# Altium PCB PowerBoard.PcbDoc (part 3 of 3)
Units mil, origin at the board's own origin, x right, y up, seen from the top; angles counter-clockwise.
Board outline 7560.09 x 3815.99 mil, 4 copper layers (Top Layer, Internal Plane 2, Internal Plane 1, Bottom Layer); 319 components, 249 nets, 1089 pads, 461 vias.
Unrouted connection lines stored in the file: 1.
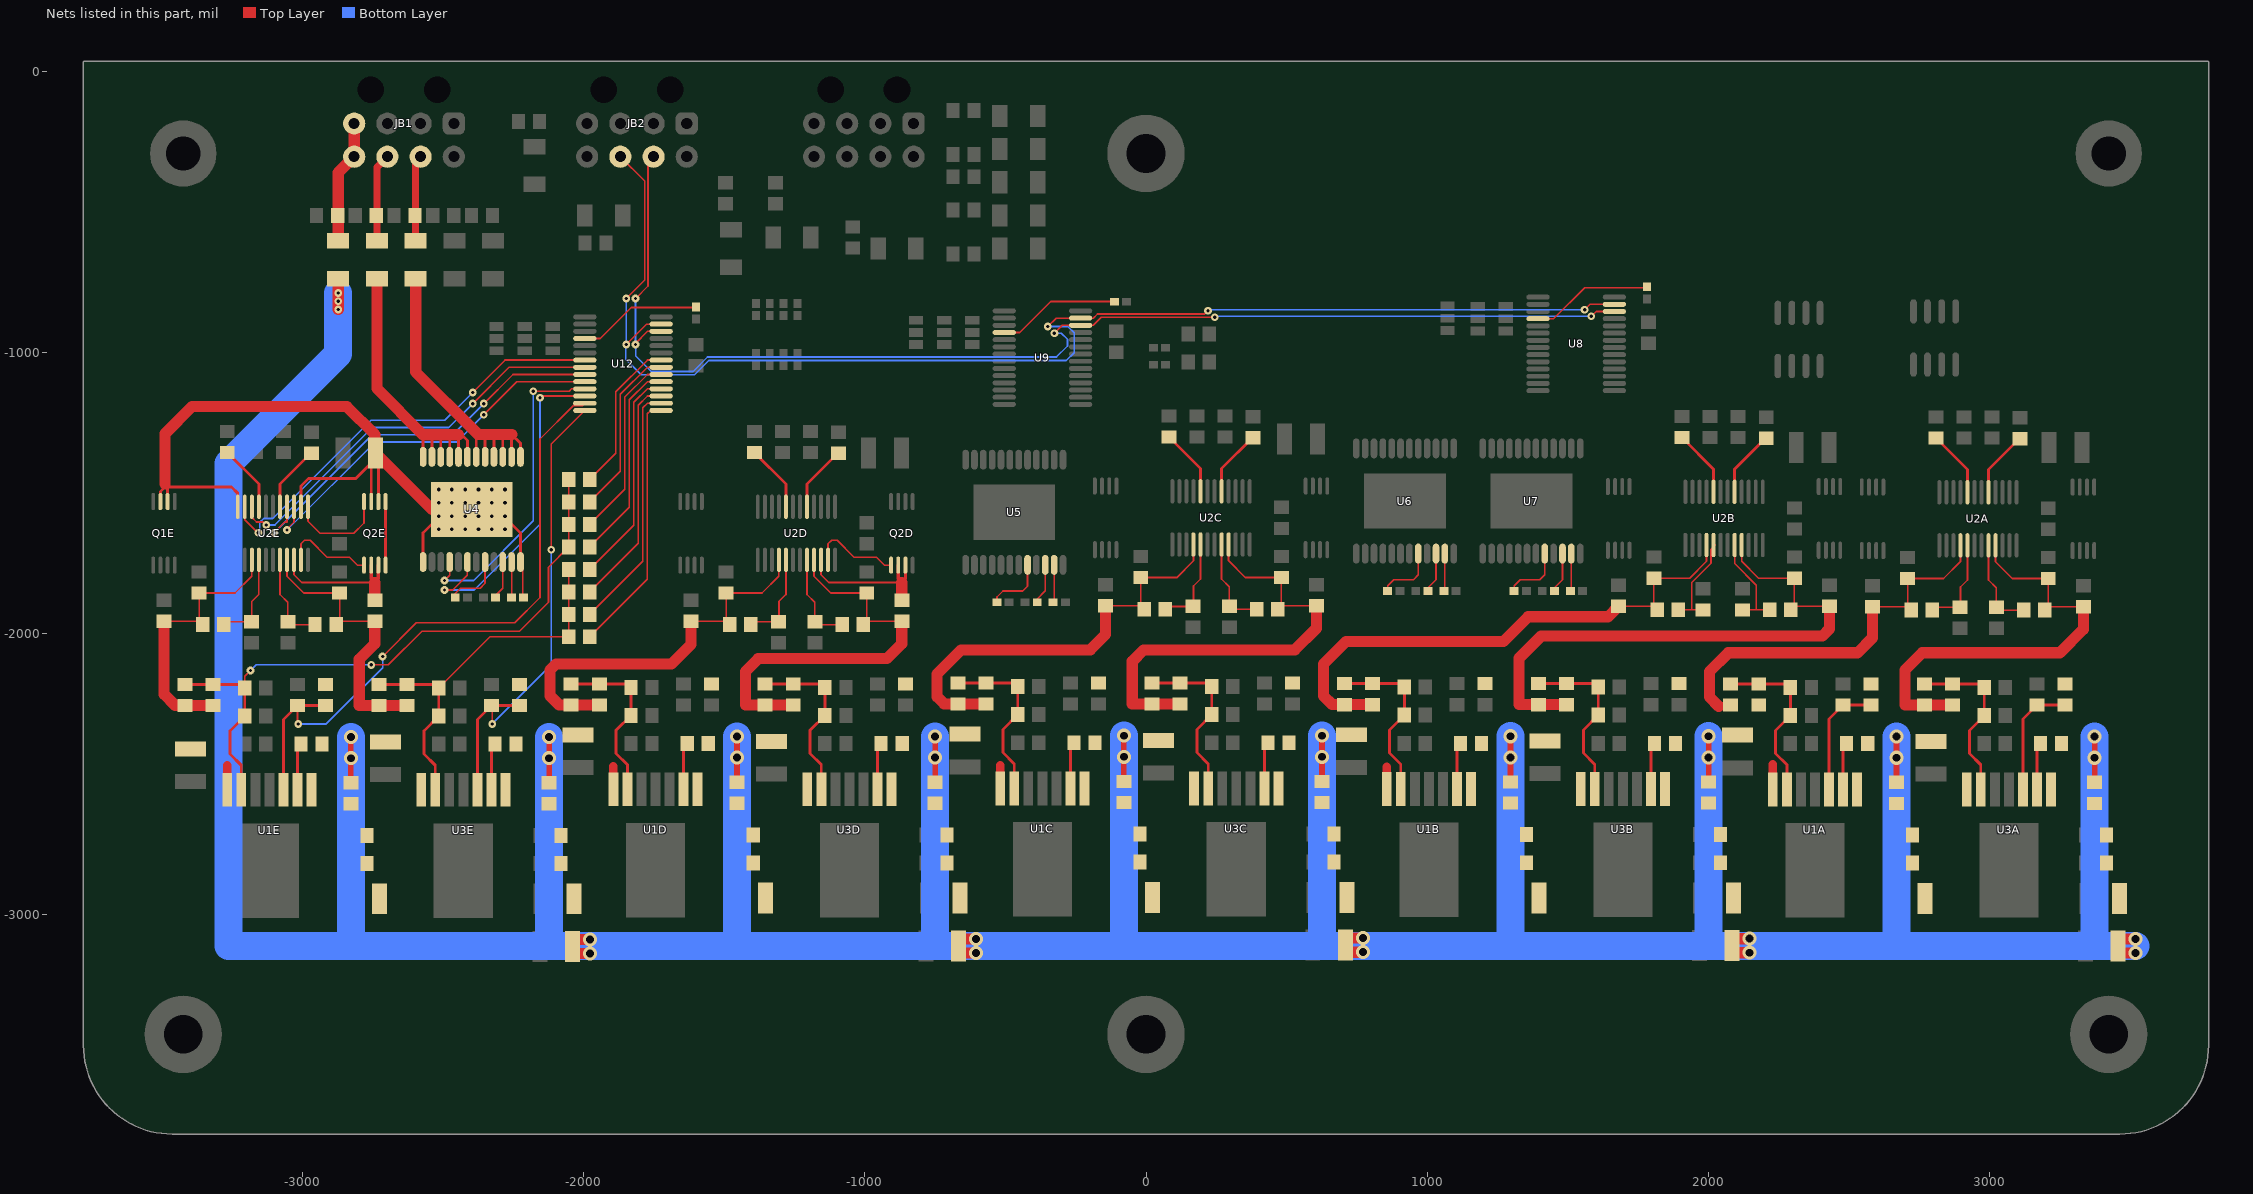
[diagram p5: the nets of this part, all layers, seen from the top]

## Via types
v1: diameter 27.56, hole 11.81, Top Layer to Bottom Layer, tented both sides, 325 vias
v2: diameter 25.98, hole 12.99, Top Layer to Bottom Layer, tented both sides, 96 vias
v3: diameter 50, hole 28, Top Layer to Bottom Layer, tented both sides, 40 vias

## Nets (pads, with @x,y where several pads share a name; then routed paths per layer and width w, separated by ;. In a path a pad name is that pad's centre, name@x,y a point inside that pad or via, vN(x,y) a via of type N, cw(c..) or ccw(c..) an arc to the next point about the centre after c; other vN are vias at no path point) (continued)
NetQ2D_G2: Q2D.G2 U2D.11 | length 322.8
  Top Layer w6: U2D.11@-1131.08,-1737.2 -1131.08,-1680.22 -1118.58,-1667.72 -1098.58,-1667.72 -1038.58,-1727.72 -958.58,-1727.72 -930.39,-1755.91 Q2D.G2@-906.97,-1755.9
NetQ2D_S2: Q2D.S2 R12D.2 U2D.10 | length 548.7
  Top Layer w6: U2D.10@-1156.08,-1737.2 -1156.08,-1790.22 -1128.58,-1817.72 -868.58,-1817.72
  Top Layer w12: Q2D.S2@-881.38,-1755.9 -881.38,-1804.92 -868.58,-1817.72 -855.79,-1804.92 Q2D.S2@-855.79,-1755.9
  Top Layer w40: R12D.2@-868.58,-1880.31 -868.58,-1817.72
NetQ2E_D1: Q2E.D1 Q2E.D2 | length 231.4
  Top Layer w10: Q2E.D2@-2705.28,-1760.91 Q2E.D1@-2705.28,-1529.53
NetQ2E_G1: Q2E.G1 U2E.13 | length 360.4
  Top Layer w6: U2E.13@-2981.16,-1548.23 -2981.16,-1600.22 -2938.66,-1642.72 -2818.66,-1642.72 -2782.05,-1606.11 Q2E.G1@-2782.05,-1529.53
NetQ2E_G2: Q2E.G2 U2E.11 | length 322.8
  Top Layer w6: U2E.11@-3006.16,-1737.2 -3006.16,-1680.22 -2993.66,-1667.72 -2973.66,-1667.72 -2913.66,-1727.72 -2833.66,-1727.72 -2805.47,-1755.91 Q2E.G2@-2782.05,-1755.91
NetQ2E_S2: Q2E.S2 R12E.2 U2E.10 | length 548.7
  Top Layer w6: U2E.10@-3031.16,-1737.2 -3031.16,-1790.22 -3003.66,-1817.72 -2743.66,-1817.72
  Top Layer w12: Q2E.S2@-2756.46,-1755.91 -2756.46,-1804.92 -2743.66,-1817.72 -2730.87,-1804.92 Q2E.S2@-2730.87,-1755.91
  Top Layer w40: R12E.2@-2743.66,-1880.32 -2743.66,-1817.72
NetR2A_2: R2A.2 R3A.2 U2A.5 | length 316
  Top Layer w6: R2A.2@2812.32,-1906.14 2897.52,-1906.14 2897.52,-1833.54 2922.42,-1808.64 U2A.5@2922.42,-1685.63
NetR2B_2: R2B.2 R3B.2 U2B.5 | length 364.1
  Top Layer w6: R2B.2@1893.98,-1914.65 1941.42,-1914.65 ; R3B.2@1980.94,-1914.65 1941.42,-1914.65 ; R3B.2@1981.42,-1915.12 R3B.2@1981.42,-1908.51 ; U2B.5@2019.07,-1684.13 2024.6,-1684.13 2009.96,-1698.77 2009.96,-1748.84 1945.84,-1812.97 1945.84,-1813.29 1941.42,-1817.72 1941.42,-1914.65
NetR2C_2: R2C.2 R3C.2 U2C.5 | length 316
  Top Layer w6: R2C.2@83.74,-1902.72 168.94,-1902.72 168.94,-1830.12 193.84,-1805.22 U2C.5@193.84,-1682.2
NetR2D_2: R2D.2 R3D.2 U2D.5 | length 316
  Top Layer w6: R2D.2@-1391.18,-1957.72 -1305.98,-1957.72 -1305.98,-1885.12 -1281.08,-1860.22 U2D.5@-1281.08,-1737.2
NetR2E_2: R2E.2 R3E.2 U2E.5 | length 316
  Top Layer w6: R2E.2@-3266.26,-1957.72 -3181.06,-1957.72 -3181.06,-1885.12 -3156.16,-1860.22 U2E.5@-3156.16,-1737.2
NetR4A_1: R4A.1 U1A.2 | length 167.6
  Top Layer w10: U1A.2@2479.92,-2553.54 2479.92,-2403.74 R4A.1@2492.52,-2391.14
NetR4B_1: R4B.1 U1B.2 | length 167.6
  Top Layer w10: U1B.2@1106.57,-2552.05 1106.57,-2402.25 R4B.1@1119.17,-2389.65
NetR4C_1: R4C.1 U1C.2 | length 167.6
  Top Layer w10: U1C.2@-268.66,-2550.12 -268.66,-2400.32 R4C.1@-256.06,-2387.72
NetR4D_1: R4D.1 U1D.2 | length 167.6
  Top Layer w10: U1D.2@-1645.04,-2553.19 -1645.04,-2403.39 R4D.1@-1632.44,-2390.79
NetR4E_1: R4E.1 U1E.2 | length 167.6
  Top Layer w10: U1E.2@-3018.66,-2555.12 -3018.66,-2405.32 R4E.1@-3006.06,-2392.72
NetR10A_2: R10A.2 R11A.2 U2A.8 | length 320.2
  Top Layer w6: U2A.8@2997.42,-1685.63 2997.42,-1808.64 3024.92,-1836.14 3024.92,-1908.74 3032.32,-1916.14 R11A.2@3107.52,-1916.14
NetR10B_2: R10B.2 R11B.2 U2B.8 | length 354.8
  Top Layer w6: U2B.8@2094.07,-1684.13 2094.07,-1749.89 2171.42,-1827.23 2171.42,-1914.65 ; R10B.2@2121.57,-1915.12 R10B.2@2121.57,-1908.51 ; R10B.2@2121.57,-1907.25 2128.97,-1914.65 2171.42,-1914.65 ; R11B.2@2204.17,-1914.65 2171.42,-1914.65
NetR10C_2: R10C.2 R11C.2 U2C.8 | length 320.2
  Top Layer w6: U2C.8@268.84,-1682.2 268.84,-1805.22 296.34,-1832.72 296.34,-1905.32 303.74,-1912.72 R11C.2@378.94,-1912.72
NetR10D_2: R10D.2 R11D.2 U2D.8 | length 320.2
  Top Layer w6: U2D.8@-1206.08,-1737.2 -1206.08,-1860.22 -1178.58,-1887.72 -1178.58,-1960.31 -1171.18,-1967.72 R11D.2@-1095.98,-1967.72
NetR10E_2: R10E.2 R11E.2 U2E.8 | length 320.2
  Top Layer w6: U2E.8@-3081.16,-1737.2 -3081.16,-1860.22 -3053.66,-1887.72 -3053.66,-1960.32 -3046.26,-1967.72 R11E.2@-2971.06,-1967.72
NetR13A_1: R13A.1 U3A.2 | length 175
  Top Layer w10: U3A.2@3169.92,-2553.54 3169.92,-2391.14 R13A.1@3182.52,-2391.14
NetR13B_1: R13B.1 U3B.2 | length 175
  Top Layer w10: U3B.2@1796.57,-2552.05 1796.57,-2389.65 R13B.1@1809.17,-2389.65
NetR13C_1: R13C.1 U3C.2 | length 175
  Top Layer w10: U3C.2@421.34,-2550.12 421.34,-2387.72 R13C.1@433.94,-2387.72
NetR13D_1: R13D.1 U3D.2 | length 175
  Top Layer w10: U3D.2@-955.04,-2553.19 -955.04,-2390.79 R13D.1@-942.44,-2390.79
NetR13E_1: R13E.1 U3E.2 | length 175
  Top Layer w10: U3E.2@-2328.66,-2555.12 -2328.66,-2392.72 R13E.1@-2316.06,-2392.72
NetR19_2: R19.2 U4.CS_DIS | length 129.6
  Top Layer w6: R19.2@-2256.85,-1874.33 U4.CS_DIS@-2256.85,-1744.72
NetR20_2: R20.2 U5.CS_DIS | length 129.6
  Top Layer w6: R20.2@-326.85,-1884.33 U5.CS_DIS@-326.85,-1754.72
NetR21_1: R21.1 U4.CS2 | length 144.8
  Top Layer w6: R21.1@-2316.93,-1877.72 -2316.93,-1866.06 -2288.35,-1837.48 U4.CS2@-2288.35,-1744.72
NetR22_1: R22.1 U4.CS1 | length 219.1
  Top Layer w6: R22.1@-2460.24,-1877.72 -2460.24,-1859.37 -2438.58,-1837.72 -2368.58,-1837.72 -2351.34,-1820.47 U4.CS1@-2351.34,-1744.72
NetR23_1: R23.1 U5.CS2 | length 144.8
  Top Layer w6: R23.1@-386.93,-1887.72 -386.93,-1876.06 -358.35,-1847.48 U5.CS2@-358.35,-1754.72
NetR24_1: R24.1 U5.CS1 | length 219.1
  Top Layer w6: R24.1@-530.24,-1887.72 -530.24,-1869.37 -508.58,-1847.72 -438.58,-1847.72 -421.34,-1830.47 U5.CS1@-421.34,-1754.72
NetR25_2: R25.2 U6.CS_DIS | length 129.6
  Top Layer w6: R25.2@1063.15,-1844.33 U6.CS_DIS@1063.15,-1714.72
NetR26_2: R26.2 U7.CS_DIS | length 129.6
  Top Layer w6: R26.2@1513.15,-1844.33 U7.CS_DIS@1513.15,-1714.72
NetR27_1: R27.1 U6.CS2 | length 144.8
  Top Layer w6: R27.1@1003.07,-1847.72 1003.07,-1836.06 1031.65,-1807.48 U6.CS2@1031.65,-1714.72
NetR28_1: R28.1 U6.CS1 | length 219.1
  Top Layer w6: R28.1@859.76,-1847.72 859.76,-1829.37 881.42,-1807.72 951.42,-1807.72 968.66,-1790.47 U6.CS1@968.66,-1714.72
NetR29_1: R29.1 U7.CS2 | length 144.8
  Top Layer w6: R29.1@1453.07,-1847.72 1453.07,-1836.06 1481.65,-1807.48 U7.CS2@1481.65,-1714.72
NetR30_1: R30.1 U7.CS1 | length 219.1
  Top Layer w6: R30.1@1309.76,-1847.72 1309.76,-1829.37 1331.42,-1807.72 1401.42,-1807.72 1418.66,-1790.47 U7.CS1@1418.66,-1714.72
NetR31_2: R31.2 U8.18 | length 442.3
  Top Layer w6: U8.18@1394.65,-879.09 1450.04,-879.09 1560.47,-768.66 1788.82,-768.66 R31.2@1790.47,-767.01
NetR32_2: R32.2 U9.18 | length 442.3
  Top Layer w6: U9.18@-504.17,-928.15 -448.78,-928.15 -338.35,-817.72 -110,-817.72 R32.2@-108.35,-816.06
NetR35_1: R35.1 U12.7 | length 612.4
  Top Layer w6: R35.1@-1978.5,-1530.71 -1869.91,-1422.11 -1869.91,-1148.14 -1773.7,-1051.93 U12.7@-1724.89,-1051.93
NetR36_1: R36.1 U12.8 | length 558
  Top Layer w6: R36.1@-1978.5,-1450.71 -1885.91,-1358.11 -1885.91,-1319.68 -1885.91,-1138.55 -1773.7,-1026.34 U12.8@-1724.89,-1026.34
NetR37_1: R37.1 U12.6 | length 666.8
  Top Layer w6: R37.1@-1978.5,-1610.71 -1853.91,-1486.11 -1853.91,-1157.73 -1773.7,-1077.52 U12.6@-1724.89,-1077.52
NetR38_1: R38.1 U12.5 | length 721.2
  Top Layer w6: R38.1@-1978.5,-1690.71 -1837.91,-1550.11 -1837.91,-1167.32 -1773.7,-1103.11 U12.5@-1724.89,-1103.11
NetR39_1: R39.1 U12.4 | length 775.6
  Top Layer w6: R39.1@-1978.5,-1770.71 -1821.91,-1614.11 -1821.91,-1176.91 -1773.7,-1128.7 U12.4@-1724.89,-1128.7
NetR40_1: R40.1 U12.3 | length 830.1
  Top Layer w6: R40.1@-1978.5,-1850.71 -1805.91,-1678.11 -1805.91,-1186.5 -1773.7,-1154.29 U12.3@-1724.89,-1154.29
NetR41_1: R41.1 U12.2 | length 884.5
  Top Layer w6: R41.1@-1978.5,-1930.71 -1789.91,-1742.11 -1789.91,-1196.09 -1773.7,-1179.88 U12.2@-1724.89,-1179.88
NetR42_1: R42.1 U12.1 | length 931.8
  Top Layer w6: R42.1@-1978.5,-2010.71 -1773.91,-1806.11 -1773.91,-1789.04 -1773.91,-1217.71 -1761.67,-1205.47 U12.1@-1724.89,-1205.47
NetR43_2: R43.2 U12.18 | length 442.3
  Top Layer w6: U12.18@-1996.54,-949.57 -1941.15,-949.57 -1830.72,-839.14 -1602.37,-839.14 R43.2@-1600.72,-837.48
NetR44A_1: R44A.1 U2A.20 | length 239.7
  Top Layer w10: R44A.1@2809.92,-1303.54 2922.42,-1416.04 U2A.20@2922.42,-1496.65
NetR44B_1: R44B.1 U2B.20 | length 239.7
  Top Layer w10: R44B.1@1906.57,-1302.05 2019.07,-1414.55 U2B.20@2019.07,-1495.16
NetR44C_1: R44C.1 U2C.20 | length 239.7
  Top Layer w10: R44C.1@81.34,-1300.12 193.84,-1412.62 U2C.20@193.84,-1493.23
NetR44D_1: R44D.1 U2D.20 | length 239.7
  Top Layer w10: R44D.1@-1393.58,-1355.12 -1281.08,-1467.62 U2D.20@-1281.08,-1548.23
NetR44E_1: R44E.1 U2E.20 | length 239.7
  Top Layer w10: R44E.1@-3268.66,-1355.12 -3156.16,-1467.62 U2E.20@-3156.16,-1548.23
NetR45A_1: R45A.1 U2A.17 | length 239.7
  Top Layer w10: U2A.17@2997.42,-1496.65 2997.42,-1416.04 R45A.1@3109.92,-1303.54
NetR45B_1: R45B.1 U2B.17 | length 239.7
  Top Layer w10: U2B.17@2094.07,-1495.16 2094.07,-1414.55 R45B.1@2206.57,-1302.05
NetR45C_1: R45C.1 U2C.17 | length 239.7
  Top Layer w10: U2C.17@268.84,-1493.23 268.84,-1412.62 R45C.1@381.34,-1300.12
NetR45D_1: R45D.1 U2D.17 | length 239.7
  Top Layer w10: U2D.17@-1206.08,-1548.23 -1206.08,-1467.62 R45D.1@-1093.58,-1355.12
NetR45E_1: R45E.1 U2E.17 | length 239.7
  Top Layer w10: U2E.17@-3081.16,-1548.23 -3081.16,-1467.62 R45E.1@-2968.66,-1355.12
PWR_SCL: JB2.4 U8.12 U9.12 U12.12 | length 4546.5
  Top Layer w6: v1(-1815.91,-970.71) -1815.91,-966.18 -1773.7,-923.98 U12.12@-1724.89,-923.98 ; v1(-1815.91,-807.09) -1771.65,-762.83 -1771.65,-322.44 JB2.4@-1751.97,-302.76 ; v1(-325.91,-930.71) -297.76,-902.56 U9.12@-232.52,-902.56 -187.51,-902.56 -159.15,-874.2 244.12,-874.2 v1(244.2,-874.12) ; v1(1584.09,-870.71) 1601.3,-853.5 U8.12@1666.3,-853.5
  Bottom Layer w6: v1(-1815.91,-970.71) v1(-1815.91,-807.09) ; v1@-1814.96,-971.65 -1814.96,-1011.81 -1760.03,-1066.74 -1611.27,-1066.74 -1560.09,-1015.56 -318.71,-1015.56 -279.53,-976.38 -279.53,-952.76 -301.57,-930.71 v1(-325.91,-930.71) ; v1(244.2,-874.12) 247.62,-870.71 v1(1584.09,-870.71)
PWR_SDA: JB2.6 U8.13 U9.13 U12.13 | length 4800.5
  Top Layer w6: JB2.6@-1870.08,-302.76 -1783.65,-389.18 -1783.65,-741.28 v1(-1849.46,-807.09) ; v1(-1849.46,-970.71) -1777.14,-898.39 U12.13@-1724.89,-898.39 ; v1(-349.64,-906.98) -319.63,-876.97 U9.13@-232.52,-876.97 -187.51,-876.97 -172.74,-862.2 208.66,-862.2 v1(220.47,-850.39) ; v1(1560.36,-846.98) 1579.43,-827.91 U8.13@1666.3,-827.91
  Bottom Layer w6: v1@-1850.39,-981.48 -1850.39,-1023.84 -1795.49,-1078.74 -1606.3,-1078.74 -1555.12,-1027.56 -283.25,-1027.56 -255.8,-1000.11 -255.8,-929.03 -277.84,-906.98 v1(-349.64,-906.98) ; v1(-1849.46,-970.71) v1(-1849.46,-807.09) ; v1(220.47,-850.39) 223.89,-846.98 v1(1560.36,-846.98)
REG1_ENA: R6A.2 R9A.1 U1A.3 | length 420.7
  Top Layer w10: U1A.3@2429.92,-2553.54 2429.92,-2303.54 R9A.1@2479.92,-2253.54 R6A.2@2579.92,-2253.54
REG1_ENE: R6E.2 R9E.1 U1E.3 U12.27 | length 2332.9
  Top Layer w6: R9E.1@-3018.66,-2255.12 -3018.66,-2317.95 v1(-3015.91,-2320.71) ; v1(-2715.91,-2080.71) -2595.91,-1960.71 -2245.91,-1960.71 -2155.91,-1870.71 -2155.91,-1307.1 -2036.42,-1187.62 -2004.28,-1187.62 U12.27@-1996.54,-1179.88
  Top Layer w10: U1E.3@-3068.66,-2555.12 -3068.66,-2305.12 R9E.1@-3018.66,-2255.12 R6E.2@-2918.66,-2255.12
  Bottom Layer w6: v1(-3015.91,-2320.71) -2915.91,-2320.71 -2715.91,-2120.71 v1(-2715.91,-2080.71)
REG1_FBA: C5A.1 R5A.1 R7A.2 R8A.2 U1A.6 | length 618.5
  Top Layer w10: C5A.1@2079.92,-2178.74 R5A.1@2179.92,-2178.74 2280.12,-2178.74 R8A.2@2292.52,-2191.14 R7A.2@2292.52,-2291.14 2239.92,-2343.74 2239.92,-2426.14 2279.92,-2466.14 U1A.6@2279.92,-2553.54
REG1_FBB: C5B.1 R5B.1 R7B.2 R8B.2 U1B.6 | length 618.5
  Top Layer w10: C5B.1@706.57,-2177.25 R5B.1@806.57,-2177.25 906.77,-2177.25 R8B.2@919.17,-2189.65 R7B.2@919.17,-2289.65 866.57,-2342.25 866.57,-2424.65 906.57,-2464.65 U1B.6@906.57,-2552.05
REG1_FBC: C5C.1 R5C.1 R7C.2 R8C.2 U1C.6 | length 618.5
  Top Layer w10: C5C.1@-668.66,-2175.32 R5C.1@-568.66,-2175.32 -468.46,-2175.32 R8C.2@-456.06,-2187.72 R7C.2@-456.06,-2287.72 -508.66,-2340.32 -508.66,-2422.72 -468.66,-2462.72 U1C.6@-468.66,-2550.12
REG1_FBD: C5D.1 R5D.1 R7D.2 R8D.2 U1D.6 | length 618.5
  Top Layer w10: C5D.1@-2045.04,-2178.39 -1945.04,-2178.39 -1844.84,-2178.39 R8D.2@-1832.44,-2190.79 R7D.2@-1832.44,-2290.79 -1885.04,-2343.39 -1885.04,-2425.79 -1845.04,-2465.79 U1D.6@-1845.04,-2553.19
REG1_FBE: C5E.1 R5E.1 R7E.2 R8E.2 R35.2 R36.2 R37.2 R38.2 U1E.6 | length 2316.6
  Top Layer w6: R8E.2@-3206.06,-2192.72 -3206.06,-2150.87 v1(-3185.91,-2130.71) ; v1(-2755.91,-2110.71) -2695.91,-2110.71 -2575.91,-1990.71 -2228.93,-1990.71 -2125.91,-1887.68 -2125.91,-1763.31 R38.2@-2053.31,-1690.71 R37.2@-2053.31,-1610.71 R35.2@-2053.31,-1530.71 R36.2@-2053.31,-1450.71
  Top Layer w10: C5E.1@-3418.66,-2180.32 -3218.46,-2180.32 R8E.2@-3206.06,-2192.72 R7E.2@-3206.06,-2292.72 -3258.66,-2345.32 -3258.66,-2427.72 -3218.66,-2467.72 U1E.6@-3218.66,-2555.12
  Bottom Layer w6: v1(-3185.91,-2130.71) -3165.91,-2110.71 v1(-2755.91,-2110.71)
REG2_ENA: R15A.2 R18A.1 U3A.3 | length 403
  Top Layer w10: U3A.3@3119.92,-2553.54 3119.92,-2303.54 R18A.1@3157.42,-2266.04 ; R18A.1@3169.92,-2253.54 R15A.2@3269.92,-2253.54
REG2_ENE: R15E.2 R18E.1 U3E.3 U12.28 | length 1739.1
  Top Layer w6: R18E.1@-2328.66,-2255.12 -2325.91,-2257.87 v1(-2325.91,-2320.71) ; v1(-2115.91,-1700.71) -2115.91,-1324.84 U12.28@-1996.54,-1205.47
  Top Layer w10: U3E.3@-2378.66,-2555.12 -2378.66,-2305.12 -2341.16,-2267.62 R18E.1@-2328.66,-2255.12 R15E.2@-2228.66,-2255.12
  Bottom Layer w6: v1(-2325.91,-2320.71) -2115.91,-2110.71 v1(-2115.91,-1700.71)
REG2_FBA: C14A.1 R14A.1 R16A.2 R17A.2 U3A.6 | length 618.5
  Top Layer w10: C14A.1@2769.92,-2178.74 R14A.1@2869.92,-2178.74 2970.12,-2178.74 R16A.2@2982.52,-2191.14 R17A.2@2982.52,-2291.14 2929.92,-2343.74 2929.92,-2426.14 2969.92,-2466.14 U3A.6@2969.92,-2553.54
REG2_FBB: C14B.1 R14B.1 R16B.2 R17B.2 U3B.6 | length 618.5
  Top Layer w10: C14B.1@1396.57,-2177.25 R14B.1@1496.57,-2177.25 1596.77,-2177.25 R16B.2@1609.17,-2189.65 R17B.2@1609.17,-2289.65 1556.57,-2342.25 1556.57,-2424.65 1596.57,-2464.65 U3B.6@1596.57,-2552.05
REG2_FBC: C14C.1 R14C.1 R16C.2 R17C.2 U3C.6 | length 618.5
  Top Layer w10: C14C.1@21.34,-2175.32 R14C.1@121.34,-2175.32 221.54,-2175.32 R16C.2@233.94,-2187.72 R17C.2@233.94,-2287.72 181.34,-2340.32 181.34,-2422.72 221.34,-2462.72 U3C.6@221.34,-2550.12
REG2_FBD: C14D.1 R14D.1 R16D.2 R17D.2 U3D.6 | length 618.5
  Top Layer w10: C14D.1@-1355.04,-2178.39 -1255.04,-2178.39 -1154.84,-2178.39 R16D.2@-1142.44,-2190.79 R17D.2@-1142.44,-2290.79 -1195.04,-2343.39 -1195.04,-2425.79 -1155.04,-2465.79 U3D.6@-1155.04,-2553.19
REG2_FBE: C14E.1 R14E.1 R16E.2 R17E.2 R39.2 R40.2 R41.2 R42.2 U3E.6 | length 1396.6
  Top Layer w6: R16E.2@-2516.06,-2192.72 -2334.06,-2010.71 R42.2@-2053.31,-2010.71 R41.2@-2053.31,-1930.71 R40.2@-2053.31,-1850.71 R39.2@-2053.31,-1770.71
  Top Layer w10: C14E.1@-2728.66,-2180.32 -2528.46,-2180.32 R16E.2@-2516.06,-2192.72 R17E.2@-2516.06,-2292.72 -2568.66,-2345.32 -2568.66,-2427.72 -2528.66,-2467.72 U3E.6@-2528.66,-2555.12
VBATT: C13A.1 C13B.1 C13C.1 C13D.1 C13E.1 FB1A.2 FB1B.2 FB1C.2 FB1D.2 FB1E.2 FB2A.2 FB2B.2 FB2C.2 FB2D.2 FB2E.2 L5.1 | length 18849
  Top Layer w20: FB1E.2@-2828.66,-2530.32 v3(-2828.66,-2442.72) v3(-2828.66,-2367.72) ; FB2E.2@-2123.66,-2530.32 v3(-2123.66,-2442.72) v3(-2123.66,-2367.72) ; FB1D.2@-1455.04,-2528.39 v3(-1455.04,-2440.79) v3(-1455.04,-2365.79) ; FB2D.2@-750.04,-2528.39 v3(-750.04,-2440.79) v3(-750.04,-2365.79) ; FB1C.2@-78.66,-2525.32 v3(-78.66,-2437.72) v3(-78.66,-2362.72) ; FB2C.2@626.34,-2525.32 v3(626.34,-2437.72) v3(626.34,-2362.72) ; FB1B.2@1296.57,-2527.24 v3(1296.57,-2439.65) v3(1296.57,-2364.65) ; FB2B.2@2001.57,-2527.24 v3(2001.57,-2439.65) v3(2001.57,-2364.65) ; FB1A.2@2669.92,-2528.74 v3(2669.92,-2441.14) v3(2669.92,-2366.14) ; FB2A.2@3374.92,-2528.74 v3(3374.92,-2441.14) v3(3374.92,-2366.14)
  Top Layer w40: v1(-2874.02,-846.46) v1(-2874.02,-816.93) v1(-2874.02,-787.4) L5.1@-2874.02,-736.22 ; C13E.1@-2015.59,-3137.72 v3(-1978.58,-3137.72) ; C13E.1@-2015.59,-3087.72 v3(-1978.58,-3087.72) ; C13D.1@-641.97,-3135.79 v3(-604.96,-3135.79) ; C13D.1@-641.97,-3085.79 v3(-604.96,-3085.79) ; C13C.1@734.41,-3132.72 v3(771.42,-3132.72) ; C13C.1@734.41,-3082.72 v3(771.42,-3082.72) ; C13B.1@2109.64,-3134.65 v3(2146.65,-3134.65) ; C13B.1@2109.64,-3084.65 v3(2146.65,-3084.65) ; C13A.1@3482.99,-3136.14 v3(3520,-3136.14) ; C13A.1@3482.99,-3086.14 v3(3520,-3086.14)
  Bottom Layer w6: v3(3520,-3136.14) 3520,-3111.14 v3(3520,-3086.14)
  Bottom Layer w100: v1(-2874.02,-787.4) v1(-2874.02,-816.93) v1(-2874.02,-846.46) -2874.02,-1003.94 -3264.27,-1394.19 -3264.27,-3111.14 -2828.66,-3111.14 ; v3(-2828.66,-2367.72) v3(-2828.66,-2442.72) -2828.66,-3111.14 ; v3(-2123.66,-2367.72) v3(-2123.66,-2442.72) -2123.66,-3111.14 ; -1455.04,-3102.01 v3(-1455.04,-2440.79) v3(-1455.04,-2365.79) ; -750.04,-3107.01 v3(-750.04,-2440.79) v3(-750.04,-2365.79) ; -78.66,-3103.9 v3(-78.66,-2437.72) v3(-78.66,-2362.72) ; 626.34,-3108.9 v3(626.34,-2437.72) v3(626.34,-2362.72) ; 1296.57,-3108.66 v3(1296.57,-2439.65) v3(1296.57,-2364.65) ; 2001.57,-3108.62 v3(2001.57,-2439.65) v3(2001.57,-2364.65) ; 2669.92,-3105.31 v3(2669.92,-2441.14) v3(2669.92,-2366.14) ; 3374.92,-3110.31 v3(3374.92,-2441.14) v3(3374.92,-2366.14) ; 3520,-3111.14 -2123.66,-3111.14 ; -2828.66,-3111.14 -2123.66,-3111.14
VBATT_CON: C27.1 JB1.7 JB1.8 L5.2 | length 441.4
  Top Layer w40: L5.2@-2874.02,-602.36 -2874.02,-359.84 JB1.8@-2816.93,-302.76 JB1.7@-2816.93,-184.65
VIN1_BYPASSEDA: C7A.2 C8A.2 C9A.1 FB1A.1 R4A.2 R6A.1 U1A.1
VIN1_BYPASSEDB: C7B.2 C8B.2 C9B.1 FB1B.1 R4B.2 R6B.1 U1B.1
VIN1_BYPASSEDC: C7C.2 C8C.2 C9C.1 FB1C.1 R4C.2 R6C.1 U1C.1
VIN1_BYPASSEDD: C7D.2 C8D.2 C9D.1 FB1D.1 R4D.2 R6D.1 U1D.1
VIN1_BYPASSEDE: C7E.2 C8E.2 C9E.1 FB1E.1 R4E.2 R6E.1 U1E.1
VIN2_BYPASSEDA: C15A.2 C16A.2 C17A.1 FB2A.1 R13A.2 R15A.1 U3A.1
VIN2_BYPASSEDB: C15B.2 C16B.2 C17B.1 FB2B.1 R13B.2 R15B.1 U3B.1
VIN2_BYPASSEDC: C15C.2 C16C.2 C17C.1 FB2C.1 R13C.2 R15C.1 U3C.1
VIN2_BYPASSEDD: C15D.2 C16D.2 C17D.1 FB2D.1 R13D.2 R15D.1 U3D.1
VIN2_BYPASSEDE: C15E.2 C16E.2 C17E.1 FB2E.1 R13E.2 R15E.1 U3E.1
VOUTE: C1E.2 Q1E.S2 Q2E.S1 R19.1 U2E.14 U2E.23 U4.VCC | length 3288.6
  Top Layer w6: U4.VCC@-2225.35,-1744.72 -2216.93,-1753.15 R19.1@-2216.93,-1877.72
  Top Layer w10: Q1E.S2@-3506.46,-1529.53 -3506.46,-1493.66 -3490.51,-1477.72 -3483.66,-1477.72 ; Q1E.S2@-3480.87,-1529.53 -3480.87,-1480.51 -3483.66,-1477.72 ; U2E.23@-3231.16,-1548.23 -3231.16,-1500.22 -3253.66,-1477.72 -3483.66,-1477.72 ; U2E.14@-3006.16,-1548.23 -3006.16,-1473.97 -2979.91,-1447.71 -2811.22,-1447.71 C1E.2@-2756.46,-1392.95 ; Q2E.S1@-2756.46,-1529.53 C1E.2@-2756.46,-1392.95 ; Q2E.S1@-2730.87,-1529.53 -2730.87,-1367.36 C1E.2@-2756.46,-1392.95 ; U4.VCC@-2571.81,-1744.72 -2571.81,-1640.95 -2488.58,-1557.72 U4.VCC@-2398.58,-1557.72 -2308.58,-1557.72 -2225.35,-1640.94 U4.VCC@-2225.35,-1744.72
  Top Layer w40: -3490.51,-1466.7 -3490.51,-1288.55 -3393.66,-1191.7 -2843.66,-1191.7 -2743.66,-1291.7 -2743.66,-1354.56 C1E.2@-2740.51,-1357.72 -2730.87,-1367.36 -2540.51,-1557.72 U4.VCC@-2488.58,-1557.72
  other v2: -2516.69,-1628.58 -2469.45,-1628.58 -2422.2,-1628.58 -2374.96,-1628.58 -2327.72,-1628.58 -2280.47,-1628.58 -2516.69,-1581.34 -2469.45,-1581.34 -2422.2,-1581.34 -2374.96,-1581.34 -2327.72,-1581.34 -2280.47,-1581.34 -2516.69,-1534.09 -2469.45,-1534.09 -2422.2,-1534.09 -2374.96,-1534.09 -2327.72,-1534.09 -2280.47,-1534.09 -2516.69,-1486.85 -2469.45,-1486.85 -2422.2,-1486.85 -2374.96,-1486.85 -2327.72,-1486.85 -2280.47,-1486.85
VREG1A: C2A.1 C5A.2 C11A.2 R1A.1 R2A.1 R5A.2 U1A.7 U2A.4 | length 1461.5
  Top Layer w6: R1A.1@2584.92,-1903.54 2709.92,-1903.54 C2A.1@2709.92,-1803.54 2837.52,-1803.54 2897.42,-1743.64 U2A.4@2897.42,-1685.63
  Top Layer w30: U1A.7@2229.92,-2553.54 2229.92,-2464.88
  Top Layer w40: 2037.4,-2257.87 2004.92,-2225.39 2004.92,-2134.21 2071.42,-2067.72 2531.42,-2067.72 2584.92,-2014.21 R1A.1@2584.92,-1903.54
VREG1B: C2B.1 C5B.2 C11B.2 R1B.1 R2B.1 R5B.2 U1B.7 U2B.4 | length 2010.6
  Top Layer w6: R1B.1@1681.57,-1902.05 1806.57,-1902.05 C2B.1@1806.57,-1802.05 1934.17,-1802.05 1994.07,-1742.15 U2B.4@1994.07,-1684.13
  Top Layer w30: U1B.7@856.57,-2552.05 856.57,-2473.19
  Top Layer w40: R5B.2@806.57,-2252.05 C5B.2@706.57,-2252.05 662.48,-2252.05 631.57,-2221.14 631.57,-2107.72 711.57,-2027.72 1271.42,-2027.72 1359.43,-1939.71 1643.91,-1939.71 R1B.1@1681.57,-1902.05
VREG1C: C2C.1 C5C.2 C11C.2 R1C.1 R2C.1 R5C.2 U1C.7 U2C.4 | length 1605.1
  Top Layer w6: R1C.1@-143.66,-1900.12 -18.66,-1900.12 C2C.1@-18.66,-1800.12 108.94,-1800.12 168.84,-1740.22 U2C.4@168.84,-1682.2
  Top Layer w30: U1C.7@-518.66,-2550.12 -518.66,-2467.95
  Top Layer w40: R5C.2@-568.66,-2250.12 C5C.2@-668.66,-2250.12 -717.4,-2250.12 -743.66,-2223.86 -743.66,-2142.8 -658.58,-2057.72 -198.58,-2057.72 -143.66,-2002.8 R1C.1@-143.66,-1900.12
VREG1D: C2D.1 C5D.2 C11D.2 R1D.1 R2D.1 R5D.2 U1D.7 U2D.4 | length 1478.8
  Top Layer w6: R1D.1@-1618.58,-1955.12 -1493.58,-1955.12 C2D.1@-1493.58,-1855.12 -1365.98,-1855.12 -1306.08,-1795.22 U2D.4@-1306.08,-1737.2
  Top Layer w30: U1D.7@-1895.04,-2553.19 -1895.04,-2471.57
  Top Layer w40: R5D.2@-1945.04,-2253.19 C5D.2@-2045.04,-2253.19 -2087.36,-2253.19 -2120.04,-2220.51 -2120.04,-2129.17 -2098.58,-2107.72 -1688.58,-2107.72 -1618.58,-2037.72 R1D.1@-1618.58,-1955.12
VREG1E: C2E.1 C5E.2 C11E.2 R1E.1 R2E.1 R5E.2 U1E.7 U2E.4 | length 1034
  Top Layer w6: R1E.1@-3493.66,-1955.12 -3368.66,-1955.12 C2E.1@-3368.66,-1855.12 -3241.06,-1855.12 -3181.16,-1795.22 U2E.4@-3181.16,-1737.2
  Top Layer w30: U1E.7@-3268.66,-2555.12 -3268.66,-2467.95
  Top Layer w40: R1E.1@-3493.66,-1955.12 -3493.66,-2215 -3453.54,-2255.12 C5E.2@-3418.66,-2255.12 R5E.2@-3318.66,-2255.12
VREG2A: C12A.2 C14A.2 C19A.2 R11A.1 R12A.1 R14A.2 U2A.9 U3A.7 | length 1620.3
  Top Layer w6: U2A.9@3022.42,-1685.63 3022.42,-1743.64 3082.32,-1803.54 C12A.2@3209.92,-1803.54 R11A.1@3209.92,-1903.54 ; R11A.1@3182.32,-1916.14 R11A.1@3197.32,-1916.14 3209.92,-1916.14 R11A.1@3209.92,-1903.54 ; R11A.1@3194.92,-1903.54 R11A.1@3209.92,-1903.54 ; R12A.1@3334.92,-1903.54 R11A.1@3209.92,-1903.54
  Top Layer w40: R14A.2@2869.92,-2253.54 C14A.2@2769.92,-2253.54 2699.92,-2253.54 2699.92,-2129.21 2761.42,-2067.72 3250.95,-2067.72 3334.92,-1983.74 R12A.1@3334.92,-1903.54
VREG2B: C12B.2 C14B.2 C19B.2 R11B.1 R12B.1 R14B.2 U2B.9 U3B.7 | length 2114
  Top Layer w6: U2B.9@2119.07,-1684.13 2119.07,-1742.15 2178.97,-1802.05 C12B.2@2306.57,-1802.05 R11B.1@2306.57,-1902.05 ; R11B.1@2278.98,-1914.65 2306.57,-1914.65 R11B.1@2306.57,-1902.05 ; R11B.1@2291.57,-1902.05 R11B.1@2306.57,-1902.05 ; R12B.1@2431.57,-1902.05 R11B.1@2306.57,-1902.05
  Top Layer w40: R14B.2@1496.57,-2252.05 1326.57,-2252.05 1326.57,-2087.25 1406.1,-2007.72 2406.1,-2007.72 2431.57,-1982.25 R12B.1@2431.57,-1902.05
VREG2C: C12C.2 C14C.2 C19C.2 R11C.1 R12C.1 R14C.2 U2C.9 U3C.7 | length 1656.7
  Top Layer w6: U2C.9@293.84,-1682.2 293.84,-1740.22 353.74,-1800.12 C12C.2@481.34,-1800.12 R11C.1@481.34,-1900.12 ; R11C.1@453.74,-1912.72 481.34,-1912.72 R11C.1@481.34,-1900.12 ; R11C.1@466.34,-1900.12 R11C.1@481.34,-1900.12 ; R12C.1@606.34,-1900.12 R11C.1@481.34,-1900.12
  Top Layer w40: R14C.2@121.34,-2250.12 -48.66,-2250.12 -48.66,-2097.8 -8.58,-2057.72 528.94,-2057.72 606.34,-1980.32 R12C.1@606.34,-1900.12
VREG2D: C12D.2 C14D.2 C19D.2 R11D.1 R12D.1 R14D.2 U2D.9 U3D.7 | length 1517.1
  Top Layer w6: U2D.9@-1181.08,-1737.2 -1181.08,-1795.22 -1121.18,-1855.12 C12D.2@-993.58,-1855.12 R11D.1@-993.58,-1955.12 ; R11D.1@-1021.18,-1967.72 -993.58,-1967.72 R11D.1@-993.58,-1955.12 ; R11D.1@-1008.58,-1955.12 R11D.1@-993.58,-1955.12 ; R12D.1@-868.58,-1955.12 R11D.1@-993.58,-1955.12
  Top Layer w40: R14D.2@-1255.04,-2253.19 -1425.04,-2253.19 -1425.04,-2134.17 -1379.25,-2088.39 -921.65,-2088.39 -868.58,-2035.31 R12D.1@-868.58,-1955.12
VREG2E: C12E.2 C14E.2 C19E.2 R11E.1 R12E.1 R14E.2 U2E.9 U3E.7 | length 1043.3
  Top Layer w6: U2E.9@-3056.16,-1737.2 -3056.16,-1795.22 -2996.26,-1855.12 C12E.2@-2868.66,-1855.12 R11E.1@-2868.66,-1955.12 ; R11E.1@-2896.26,-1967.72 R11E.1@-2881.26,-1967.72 -2868.66,-1967.72 R11E.1@-2868.66,-1955.12 ; R11E.1@-2883.66,-1955.12 R11E.1@-2868.66,-1955.12 ; R12E.1@-2743.66,-1955.12 R11E.1@-2868.66,-1955.12
  Top Layer w40: R12E.1@-2743.66,-1955.12 -2743.66,-2035.32 -2798.66,-2090.32 -2798.66,-2255.12 C14E.2@-2728.66,-2255.12 R14E.2@-2628.66,-2255.12
VVAR_FAULT1: U2E.21 U12.22 | length 1465.4
  Top Layer w6: U2E.21@-3181.16,-1548.23 -3181.16,-1585.45 -3164.33,-1602.28 -3140.31,-1602.28 v1(-3129.86,-1612.74) ; v1(-2395.46,-1181.15) -2266.25,-1051.93 U12.22@-1996.54,-1051.93
  Bottom Layer w6: v1(-3129.86,-1612.74) -3098.93,-1612.74 -2752.5,-1266.3 -2480.61,-1266.3 v1(-2395.46,-1181.15)
VVAR_FAULT2: U2E.16 U12.23 | length 1454.3
  Top Layer w6: v1(-3101.88,-1640.71) -3063.46,-1602.28 -3056.16,-1602.28 U2E.16@-3056.16,-1548.23 ; v1(-2355.91,-1181.15) -2252.28,-1077.52 U12.23@-1996.54,-1077.52
  Bottom Layer w6: v1(-3101.88,-1640.71) -2753.06,-1291.89 -2466.65,-1291.89 v1(-2355.91,-1181.15)
VVAR_PWRGD1: U2E.22 U12.21 | length 1550.1
  Top Layer w6: U2E.22@-3206.16,-1548.23 -3206.16,-1594.25 -3159.71,-1640.71 v1(-3157.83,-1640.71) ; v1(-2395.46,-1141.59) -2280.22,-1026.34 U12.21@-1996.54,-1026.34
  Bottom Layer w6: v1(-3157.83,-1640.71) -3150.37,-1633.25 -3152.64,-1630.98 -3152.64,-1603.3 -3139.29,-1589.96 -3106.66,-1589.96 -2757.41,-1240.71 -2494.58,-1240.71 v1(-2395.46,-1141.59)
VVAR_PWRGD2: U2E.15 U12.24 | length 1370.6
  Top Layer w6: v1(-3055.91,-1630.71) -3055.91,-1627.03 -3031.16,-1602.28 U2E.15@-3031.16,-1548.23 ; v1(-2355.91,-1220.71) -2238.31,-1103.11 U12.24@-1996.54,-1103.11
  Bottom Layer w6: v1(-3055.91,-1630.71) -2742.68,-1317.48 -2452.68,-1317.48 v1(-2355.91,-1220.71)
VVAR_TX1: L3.1 U4.OUT1 | length 1265.7
  Top Layer w10: U4.OUT1@-2382.83,-1370.71 -2382.83,-1283.78 ; U4.OUT1@-2351.34,-1370.71 -2351.34,-1290.71 ; U4.OUT1@-2319.84,-1370.71 -2319.84,-1290.71 ; U4.OUT1@-2288.35,-1370.71 -2288.35,-1290.71 ; U4.OUT1@-2256.85,-1370.71 -2256.85,-1290.71 -2225.35,-1322.2 U4.OUT1@-2225.35,-1370.71
  Top Layer w40: L3.1@-2598.43,-736.22 -2598.43,-1068.19 -2382.83,-1283.78 -2375.91,-1290.71 -2351.34,-1290.71 -2319.84,-1290.71 -2288.35,-1290.71 -2256.85,-1290.71
VVAR_TX1_CON: C25.1 JB1.4 L3.2 | length 306.9
  Top Layer w25: L3.2@-2598.43,-602.36 -2598.43,-320.47 JB1.4@-2580.71,-302.76
VVAR_TX1_EN: U4.IN1 U12.26 | length 1199.4
  Top Layer w6: v1(-2495.91,-1844.27) -2466.32,-1844.27 -2414.33,-1792.28 U4.IN1@-2414.33,-1744.72 ; v1(-2155.91,-1160.71) -2149.49,-1154.29 U12.26@-1996.54,-1154.29
  Bottom Layer w6: v1(-2495.91,-1844.27) -2389.46,-1844.27 -2155.91,-1610.71 v1(-2155.91,-1160.71)
VVAR_TX2: L4.1 U4.OUT2 | length 1238.5
  Top Layer w10: U4.OUT2@-2571.81,-1370.71 -2571.81,-1292.28 ; U4.OUT2@-2540.31,-1370.71 -2540.31,-1292.28 ; U4.OUT2@-2508.82,-1370.71 -2508.82,-1292.28 ; U4.OUT2@-2477.32,-1370.71 -2477.32,-1292.28 ; U4.OUT2@-2445.83,-1370.71 -2445.83,-1292.28 -2434.33,-1292.28 -2414.33,-1312.28 U4.OUT2@-2414.33,-1370.71
  Top Layer w40: L4.1@-2736.22,-738.19 -2736.22,-1127.87 -2571.81,-1292.28 -2540.31,-1292.28 -2508.82,-1292.28 -2477.32,-1292.28 -2445.83,-1292.28
VVAR_TX2_CON: C26.1 JB1.6 L4.2 | length 315.1
  Top Layer w25: L4.2@-2736.22,-602.36 -2736.22,-340.16 JB1.6@-2698.82,-302.76
VVAR_TX2_EN: U4.IN2 U12.25 | length 1125.8
  Top Layer w6: v1(-2495.91,-1810.71) -2495.75,-1810.71 -2477.32,-1792.28 U4.IN2@-2477.32,-1744.72 ; v1(-2179.64,-1136.98) -2051.98,-1136.98 -2043.7,-1128.7 U12.25@-1996.54,-1128.7
  Bottom Layer w6: v1(-2495.91,-1810.71) -2392.1,-1810.71 -2179.64,-1598.25 v1(-2179.64,-1136.98)
pads on no net: JB1.M1 JB1.M2 JB2.M1 JB2.M2 JB3.M1 JB3.M2 U4.3 U4.5 U4.7 U4.9 U5.3 U5.5 U5.7 U5.9 U6.3 U6.5 U6.7 U6.9 U7.3 U7.5 U7.7 U7.9 U8.11 U8.14 U8.19 U8.20 U9.11 U9.14 U9.19 U9.20 U12.11 U12.14 U12.19 U12.20

## Polygon pours and split planes (outlines as drawn)
VREG1E on Top Layer "Top Solder-No Net" (solid, remove dead copper, pour order 31): -3248.66,-2617.71 -3248.66,-2442.71 -3273.66,-2417.71 -3273.66,-2355.31 -3273.66,-2217.71 -3473.66,-2217.71 -3513.58,-2217.71 -3513.58,-2417.71 -3323.66,-2417.71 -3298.66,-2442.71 -3298.66,-2617.71
VREG1D on Top Layer "Top Solder-No Net" (solid, remove dead copper, pour order 32): -1875.04,-2615.78 -1875.04,-2440.78 -1900.04,-2415.78 -1900.04,-2353.38 -1900.04,-2215.78 -2100.04,-2215.78 -2139.96,-2215.78 -2139.96,-2415.78 -1950.04,-2415.78 -1925.04,-2440.78 -1925.04,-2615.78
VREG2D on Top Layer "Top Layer-No Net" (solid, remove dead copper, pour order 41): -1420.24,-2208.39 -1155.04,-2208.39 -1145.04,-2198.39 -1125.04,-2218.39 -1125.04,-2598.39 -1255.04,-2598.39 -1255.04,-2448.39 -1445.04,-2448.39 -1445.04,-2208.39
GND on Top Layer "Top Layer-No Net" (solid, remove dead copper, pour order 48): 1989.92,-2456.18 2179.92,-2456.18 2189.92,-2446.14 3359.92,-2446.14 3359.92,-2867.62 3489.92,-2998.07 3489.92,-3188.74 1989.92,-3188.74
VIN2_BYPASSEDC on Top Layer "Top Layer-No Net" (solid, remove dead copper, pour order 35): 471.34,-2105.32 471.34,-2455.32 431.34,-2495.32 431.34,-2615.32 561.34,-2615.32 641.34,-2695.32 641.34,-3002.72 751.34,-3002.72 751.34,-2592.72 621.34,-2465.32 621.34,-2105.32
VREG1C on Top Layer "Top Solder-No Net" (solid, remove dead copper, pour order 29): -496.69,-2617.28 -496.69,-2442.28 -521.69,-2417.28 -521.69,-2354.88 -521.69,-2217.28 -721.69,-2217.28 -746.69,-2217.68 -746.69,-2417.28 -571.69,-2417.28 -546.69,-2442.28 -546.69,-2617.28
VREG2B on Top Layer "Top Layer-No Net" (solid, remove dead copper, pour order 39): 1331.38,-2207.25 1596.57,-2207.25 1606.57,-2197.25 1626.57,-2217.25 1626.57,-2597.25 1496.57,-2597.25 1496.57,-2447.25 1306.57,-2447.25 1306.57,-2207.25
VIN2_BYPASSEDD on Top Layer "Top Layer-No Net" (solid, remove dead copper, pour order 36): -905.04,-2108.39 -905.04,-2458.39 -945.04,-2498.39 -945.04,-2618.39 -815.04,-2618.39 -735.04,-2698.39 -735.04,-3005.79 -625.04,-3005.79 -625.04,-2595.79 -755.04,-2468.39 -755.04,-2108.39
VREG1B on Top Layer "Top Solder-No Net" (solid, remove dead copper, pour order 28): 881.57,-2614.65 881.57,-2439.65 856.57,-2414.65 856.57,-2352.25 856.57,-2214.65 656.57,-2214.65 631.57,-2215.04 631.57,-2414.65 806.57,-2414.65 831.57,-2439.65 831.57,-2614.65
VIN1_BYPASSEDD on Top Layer "Top Layer-No Net" (solid, remove dead copper, pour order 46): -1445.04,-2105.79 -1595.04,-2105.79 -1595.04,-2465.79 -1625.04,-2495.79 -1625.04,-2625.79 -1615.04,-2625.79 -1565.04,-2675.79 -1445.04,-2675.79 -1445.04,-3015.79 -1285.04,-3015.79 -1285.04,-2675.79 -1395.04,-2565.79 -1455.04,-2505.79 -1455.04,-2485.79
GND on Top Layer "Top Layer-No Net" (solid, remove dead copper, pour order 49): 614.69,-2454.25 804.69,-2454.25 814.69,-2444.21 1984.69,-2444.21 1984.69,-2865.69 2114.69,-2996.14 2114.69,-3186.81 614.69,-3186.81
VREG1A on Top Layer "Top Solder-No Net" (solid, remove dead copper, pour order 27): 2254.92,-2616.14 2254.92,-2441.14 2229.92,-2416.14 2229.92,-2353.74 2229.92,-2216.14 2029.92,-2216.14 2004.92,-2216.54 2004.92,-2416.14 2179.92,-2416.14 2204.92,-2441.14 2204.92,-2616.14
VREG2E on Top Layer "Top Layer-No Net" (solid, remove dead copper, pour order 42): -2793.86,-2210.32 -2528.66,-2210.32 -2518.66,-2200.32 -2498.66,-2220.32 -2498.66,-2600.32 -2628.66,-2600.32 -2628.66,-2450.32 -2818.66,-2450.32 -2818.66,-2210.32
VREG2C on Top Layer "Top Layer-No Net" (solid, remove dead copper, pour order 40): -43.86,-2205.32 221.34,-2205.32 231.34,-2195.32 251.34,-2215.32 251.34,-2595.32 121.34,-2595.32 121.34,-2445.32 -68.66,-2445.32 -68.66,-2205.32
GND on Top Layer "Top Layer-No Net" (solid, remove dead copper, pour order 51): -3508.66,-2457.75 -3318.66,-2457.75 -3308.66,-2447.72 -2138.66,-2447.72 -2138.66,-2869.19 -2008.66,-2999.65 -2008.66,-3190.32 -3508.66,-3190.32
VREG2A on Top Layer "Top Layer-No Net" (solid, remove dead copper, pour order 38): 2704.72,-2208.74 2969.92,-2208.74 2979.92,-2198.74 2999.92,-2218.74 2999.92,-2598.74 2869.92,-2598.74 2869.92,-2448.74 2679.92,-2448.74 2679.92,-2208.74
VIN2_BYPASSEDE on Top Layer "Top Layer-No Net" (solid, remove dead copper, pour order 37): -2278.66,-2110.32 -2278.66,-2460.32 -2318.66,-2500.32 -2318.66,-2620.32 -2188.66,-2620.32 -2108.66,-2700.32 -2108.66,-3007.72 -1998.66,-3007.72 -1998.66,-2597.72 -2128.66,-2470.32 -2128.66,-2110.32
GND on Top Layer "Top Layer-No Net" (solid, remove dead copper, pour order 50): -759.8,-2457.75 -569.8,-2457.75 -559.8,-2447.72 610.2,-2447.72 610.2,-2869.19 740.2,-2999.65 740.2,-3190.32 -759.8,-3190.32
VIN1_BYPASSEDB on Top Layer "Top Layer-No Net" (solid, remove dead copper, pour order 44): 1306.57,-2104.65 1156.57,-2104.65 1156.57,-2464.65 1126.57,-2494.65 1126.57,-2624.65 1136.57,-2624.65 1186.57,-2674.65 1306.57,-2674.65 1306.57,-3014.65 1466.57,-3014.65 1466.57,-2674.65 1356.57,-2564.65 1296.57,-2504.65 1296.57,-2484.65
VIN2_BYPASSEDA on Top Layer "Top Layer-No Net" (solid, remove dead copper, pour order 33): 3219.92,-2108.74 3219.92,-2458.74 3179.92,-2498.74 3179.92,-2618.74 3309.92,-2618.74 3389.92,-2698.74 3389.92,-3006.14 3499.92,-3006.14 3499.92,-2596.14 3369.92,-2468.74 3369.92,-2108.74
GND on Top Layer "Top Layer-No Net" (solid, remove dead copper, pour order 52): -2132.29,-2454.68 -1942.29,-2454.68 -1932.29,-2444.65 -762.29,-2444.65 -762.29,-2866.12 -632.29,-2996.58 -632.29,-3187.25 -2132.29,-3187.25
VIN1_BYPASSEDE on Top Layer "Top Layer-No Net" (solid, remove dead copper, pour order 47): -2818.66,-2107.72 -2968.66,-2107.72 -2968.66,-2467.72 -2998.66,-2497.72 -2998.66,-2627.72 -2988.66,-2627.72 -2938.66,-2677.72 -2818.66,-2677.72 -2818.66,-3017.72 -2658.66,-3017.72 -2658.66,-2677.72 -2768.66,-2567.72 -2828.66,-2507.72 -2828.66,-2487.72
VIN1_BYPASSEDC on Top Layer "Top Layer-No Net" (solid, remove dead copper, pour order 45): -68.66,-2102.72 -218.66,-2102.72 -218.66,-2462.72 -248.66,-2492.72 -248.66,-2622.72 -238.66,-2622.72 -188.66,-2672.72 -68.66,-2672.72 -68.66,-3012.72 91.34,-3012.72 91.34,-2672.72 -18.66,-2562.72 -78.66,-2502.72 -78.66,-2482.72
VIN2_BYPASSEDB on Top Layer "Top Layer-No Net" (solid, remove dead copper, pour order 34): 1846.57,-2107.25 1846.57,-2457.25 1806.57,-2497.25 1806.57,-2617.25 1936.57,-2617.25 2016.57,-2697.25 2016.57,-3004.65 2126.57,-3004.65 2126.57,-2594.65 1996.57,-2467.25 1996.57,-2107.25
VIN1_BYPASSEDA on Top Layer "Top Layer-No Net" (solid, remove dead copper, pour order 43): 2679.92,-2106.14 2529.92,-2106.14 2529.92,-2466.14 2499.92,-2496.14 2499.92,-2626.14 2509.92,-2626.14 2559.92,-2676.14 2679.92,-2676.14 2679.92,-3016.14 2839.92,-3016.14 2839.92,-2676.14 2729.92,-2566.14 2669.92,-2506.14 2669.92,-2486.14
3V3_BUS on Internal Plane 2 (split plane): 3759.95,-3464.57 3758.33,-3464.57 3758.5,-3464.98 3759.97,-3464.95 3760.01,-3465.37 3759.68,-3479.06 3758.61,-3493.53 3756.83,-3507.92 3754.35,-3522.21 3751.18,-3536.36 3747.31,-3550.34 3742.76,-3564.11 3737.54,-3577.64 3731.66,-3590.89 3725.14,-3603.85 3718,-3616.47 3710.24,-3628.72 3701.89,-3640.58 3692.96,-3652.01 3683.49,-3662.99 3673.49,-3673.49 3662.99,-3683.49 3652.01,-3692.96 3640.58,-3701.89 3628.72,-3710.24 3616.47,-3718 3603.85,-3725.14 3590.89,-3731.66 3577.64,-3737.54 3564.11,-3742.76 3550.34,-3747.31 3536.36,-3751.18 3522.21,-3754.35 3507.92,-3756.83 3493.53,-3758.61 3479.06,-3759.68 3465.26,-3760.01 3464.57,-3759.95 -3464.18,-3759.95 -3464.15,-3758.5 -3464.57,-3758.33 -3464.57,-3759.95 -3464.58,-3759.95 -3465.27,-3760.01 -3479.06,-3759.68 -3493.53,-3758.61 -3507.92,-3756.83 -3522.21,-3754.35 -3536.36,-3751.18 -3550.34,-3747.31 -3564.11,-3742.76 -3577.64,-3737.54 -3590.89,-3731.66 -3603.85,-3725.14 -3616.47,-3718 -3628.72,-3710.24 -3640.58,-3701.89 -3652.01,-3692.96 -3662.99,-3683.49 -3673.49,-3673.49 -3683.49,-3662.99 -3692.96,-3652.01 -3701.89,-3640.57 -3710.24,-3628.72 -3718,-3616.47 -3725.14,-3603.85 -3731.66,-3590.89 -3737.54,-3577.64 -3742.76,-3564.11 -3747.31,-3550.34 -3751.18,-3536.36 -3754.35,-3522.21 -3756.83,-3507.92 -3758.61,-3493.53 -3759.68,-3479.06 -3760.01,-3465.26 -3759.98,-3464.95 -3759.95,-3464.57 -3759.95,-3464.56 -3759.95,15.85 3759.95,15.85
GND on Internal Plane 1 (split plane): 3759.95,-3464.57 3758.33,-3464.57 3758.5,-3464.98 3759.97,-3464.95 3760.01,-3465.37 3759.68,-3479.06 3758.61,-3493.53 3756.83,-3507.92 3754.35,-3522.21 3751.18,-3536.36 3747.31,-3550.34 3742.76,-3564.11 3737.54,-3577.64 3731.66,-3590.89 3725.14,-3603.85 3718,-3616.47 3710.24,-3628.72 3701.89,-3640.58 3692.96,-3652.01 3683.49,-3662.99 3673.49,-3673.49 3662.99,-3683.49 3652.01,-3692.96 3640.58,-3701.89 3628.72,-3710.24 3616.47,-3718 3603.85,-3725.14 3590.89,-3731.66 3577.64,-3737.54 3564.11,-3742.76 3550.34,-3747.31 3536.36,-3751.18 3522.21,-3754.35 3507.92,-3756.83 3493.53,-3758.61 3479.06,-3759.68 3465.26,-3760.01 3464.57,-3759.95 -3464.18,-3759.95 -3464.15,-3758.5 -3464.57,-3758.33 -3464.57,-3759.95 -3464.58,-3759.95 -3465.27,-3760.01 -3479.06,-3759.68 -3493.53,-3758.61 -3507.92,-3756.83 -3522.21,-3754.35 -3536.36,-3751.18 -3550.34,-3747.31 -3564.11,-3742.76 -3577.64,-3737.54 -3590.89,-3731.66 -3603.85,-3725.14 -3616.47,-3718 -3628.72,-3710.24 -3640.58,-3701.89 -3652.01,-3692.96 -3662.99,-3683.49 -3673.49,-3673.49 -3683.49,-3662.99 -3692.96,-3652.01 -3701.89,-3640.57 -3710.24,-3628.72 -3718,-3616.47 -3725.14,-3603.85 -3731.66,-3590.89 -3737.54,-3577.64 -3742.76,-3564.11 -3747.31,-3550.34 -3751.18,-3536.36 -3754.35,-3522.21 -3756.83,-3507.92 -3758.61,-3493.53 -3759.68,-3479.06 -3760.01,-3465.26 -3759.98,-3464.95 -3759.95,-3464.57 -3759.95,-3464.56 -3759.95,15.85 3759.95,15.85

## Other copper
Top Layer:
  region net GND: 3489.92,-3185.71 -3508.91,-3185.71 -3508.91,-3237.71 3489.92,-3237.71

## Silkscreen, mask and mechanical layers (free items; w line width, h text height)
Top Overlay:
  circle w11.81: c1429.03,-332.37 r246.06
  lines w7.87: 1260.4,-549.97 cw(c1527.46,-332.37) 1265.22,-108.98 ; 1271.97,-614.64 cw(c1675.09,-332.37) 1271.97,-50.1
  lines w15.75: 1258.55,-430.8 1429.03,-332.37 ; 1258.55,-430.8 1258.55,-233.94 1429.03,-135.52 ; 1258.55,-430.8 1429.03,-529.22 1599.51,-430.8 ; 1429.03,-332.37 1429.03,-135.52 ; 1429.03,-332.37 1599.51,-430.8 ; 1429.03,-135.52 1599.51,-233.94 1599.51,-430.8
  text "BLUESAT" at 1747.05,-312.01 h157.48
  text "PowerBoard V2.1  2013" at 1743.99,-430.8 h157.48
  text "0" at 1014.09,-820.71 h30 r180
  text "0" at -875.91,-870.71 h30 r180
  text "0" at -2365.91,-890.71 h30 r180
  text "1" at 1014.09,-900.71 h30 r180
  text "D1" at 344.09,-910.71 h40 r180
  text "1" at -875.91,-950.71 h30 r180
  text "1" at -2365.91,-980.71 h30 r180
  text "D2" at 344.09,-1010.71 h40 r180
  text "VVARB" at -2925.91,-3130.71 h60 r180
  text "VVARA" at -2235.91,-3130.71 h60 r180
  text "13V6B" at -1555.91,-3130.71 h60 r180
  text "13V6A" at -855.91,-3130.71 h60 r180
  text "9V1B" at -175.91,-3130.71 h60 r180
  text "9V1A" at 514.09,-3130.71 h60 r180
  text "5V0B" at 1204.09,-3130.71 h60 r180
  text "5V0A" at 1894.09,-3130.71 h60 r180
  text "3V3B" at 2574.09,-3130.71 h60 r180
  text "3V3A" at 3264.09,-3130.71 h60 r180
Mechanical 5:
  lines w1: -3464.57,-3779.53 cw(c-3464.57,-3464.57) -3779.53,-3464.57 -3779.53,35.43 3779.53,35.43 3779.53,-3464.57 cw(c3464.57,-3464.57) 3464.57,-3779.53 -3464.57,-3779.53 ; -3464.57,-3779.53 -3464.57,-3779.53

## Text inside footprints (layer, text, board x,y; h text height)
JB1: Mechanical 15 "EDGE OF BOARD" at -2521.65,66.93 h19.68 r180
JB2: Mechanical 15 "EDGE OF BOARD" at -1692.91,66.93 h19.68 r180
JB3: Mechanical 15 "EDGE OF BOARD" at -885.83,66.93 h19.68 r180